# Altium PCB DigiPidCntlrPcbDoc.PcbDoc
Units mil, origin at the board's own origin, x right, y up, seen from the top; angles counter-clockwise.
Board outline 6000 x 4430 mil, 2 copper layers (Top Layer, Bottom Layer); 16 components, 8 nets, 34 pads, 0 vias.
Unrouted connection lines stored in the file: 22.
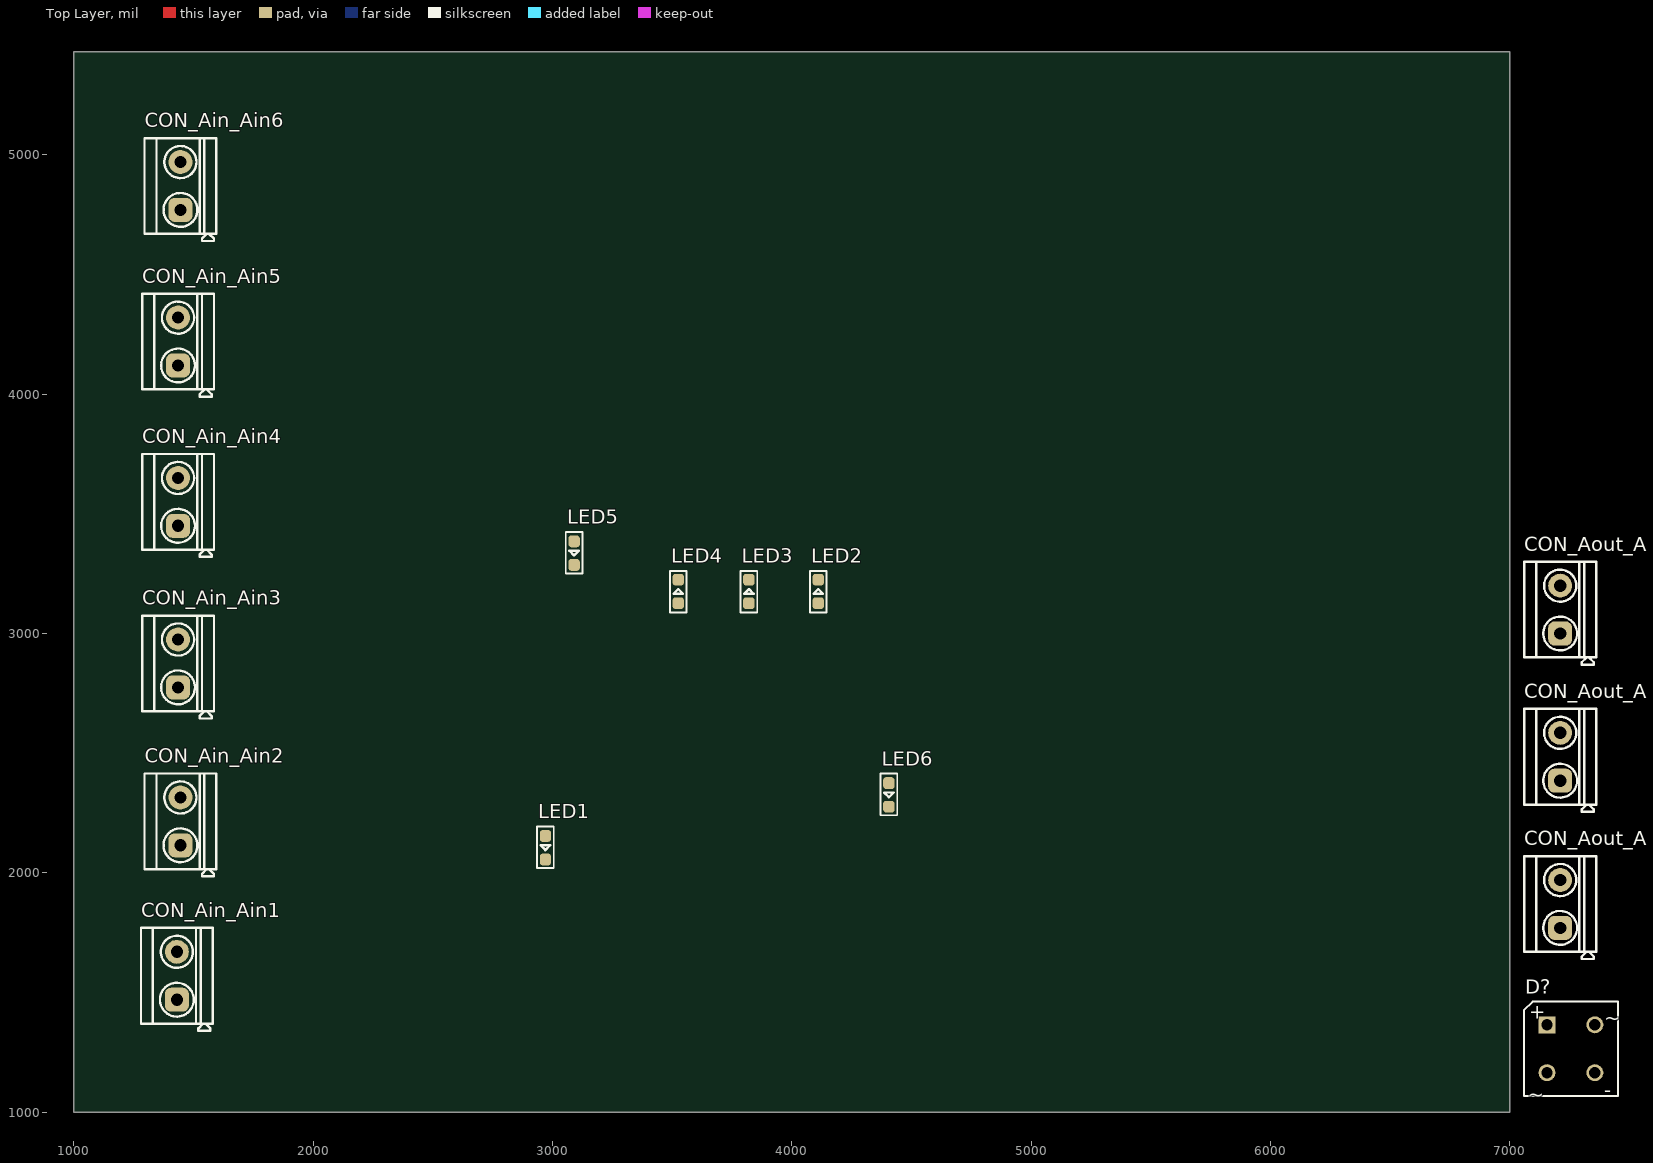
[diagram p0: Top Layer view]
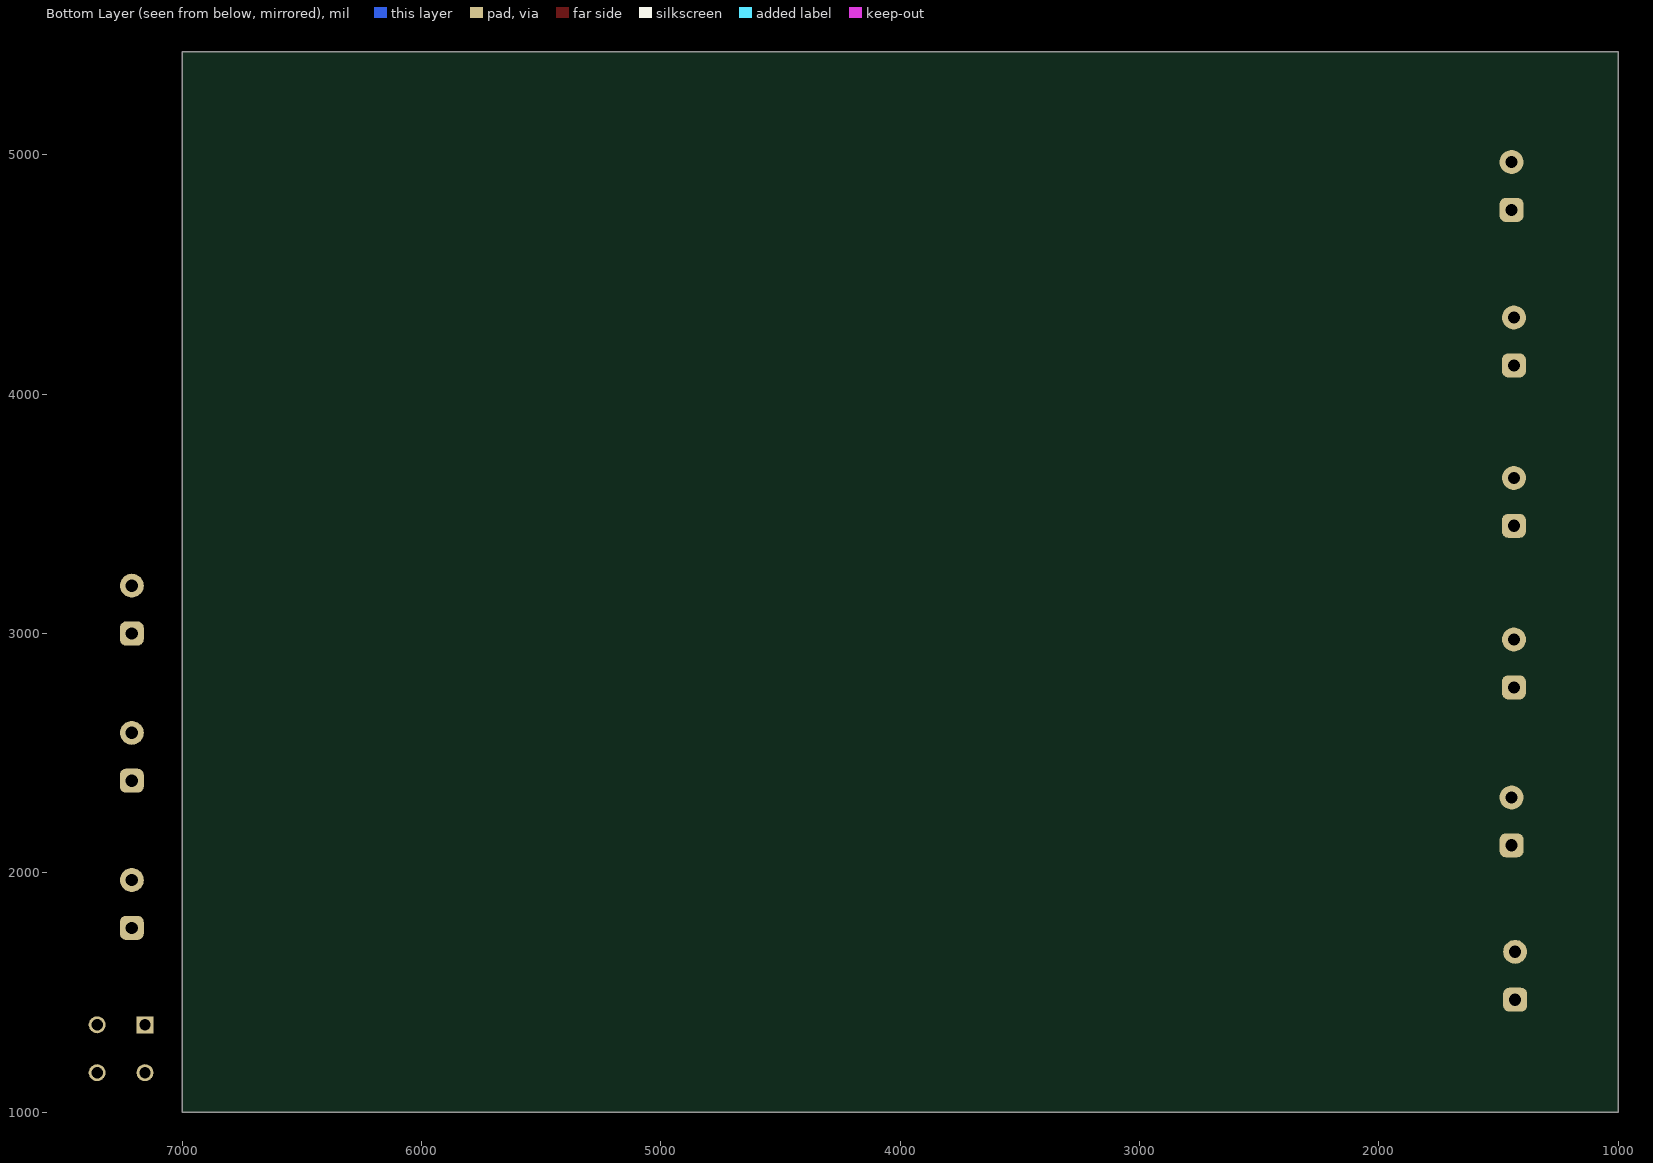
[diagram p1: Bottom Layer view, seen from below]

## Layer stack, top to bottom
Top Solder: solder mask 0.4, Solder Resist, Dk 3.5
Top Layer: signal copper 1.4
Dielectric 1: dielectric 12.6, FR-4, Dk 4.8
Bottom Layer: signal copper 1.4
Bottom Solder: solder mask 0.4, Solder Resist, Dk 3.5

## Board outline
1000,1000 7000,1000 7000,5430 1000,5430

## Design rules (kind name [scope] priority, off if disabled: settings)
Clearance [All] p1: gap=10 ignorepadtopadclearanceinfootprint=FALSE except(0: Arc-Hole Track-Hole SMDPad-Hole THPad-Hole Via-Hole Fill-Hole Poly-Hole Region-Hole Text-Hole)
PolygonConnect [All] p1: connectstyle=Relief reliefconductorwidth=10 reliefentries=4 polygonreliefangle="90 Angle" airgapwidth=10
RoomDefinition Designator [InComponentClass('Designator')] p1: confinementstyle=ConfineIn formatcopy=TRUE lockcomponents=FALSE outline 7045,1055 7465,1055 7465,1575 7045,1575
RoomDefinition Aout3 [InComponentClass('Aout3')] p2: confinementstyle=ConfineIn formatcopy=TRUE lockcomponents=FALSE outline 7045,2860 7880,2860 7880,3420 7045,3420
RoomDefinition Aout2 [InComponentClass('Aout2')] p3: confinementstyle=ConfineIn formatcopy=TRUE lockcomponents=FALSE outline 7045,2245 7880,2245 7880,2805 7045,2805
RoomDefinition Aout1 [InComponentClass('Aout1')] p4: confinementstyle=ConfineIn formatcopy=TRUE lockcomponents=FALSE outline 7045,1630 7860,1630 7860,2190 7045,2190
RoomDefinition Ain2 [InComponentClass('Ain2')] p5: confinementstyle=ConfineIn formatcopy=TRUE lockcomponents=FALSE outline 1280,1975 1995,1975 1995,2535 1280,2535
RoomDefinition Ain3 [InComponentClass('Ain3')] p6: confinementstyle=ConfineIn formatcopy=TRUE lockcomponents=FALSE outline 1270,2635 1985,2635 1985,3195 1270,3195
RoomDefinition Ain4 [InComponentClass('Ain4')] p7: confinementstyle=ConfineIn formatcopy=TRUE lockcomponents=FALSE outline 1270,3310 1985,3310 1985,3870 1270,3870
RoomDefinition Ain5 [InComponentClass('Ain5')] p8: confinementstyle=ConfineIn formatcopy=TRUE lockcomponents=FALSE outline 1270,3980 1985,3980 1985,4540 1270,4540
RoomDefinition Ain6 [InComponentClass('Ain6')] p9: confinementstyle=ConfineIn formatcopy=TRUE lockcomponents=FALSE outline 1280,4630 1995,4630 1995,5190 1280,5190
RoomDefinition Digi_PID_Cltr [InComponentClass('Digi_PID_Cltr')] p10: confinementstyle=ConfineIn formatcopy=TRUE lockcomponents=FALSE outline 2670,1840.79 5395,1840.79 5395,3795 2670,3795
RoomDefinition Ain1 [InComponentClass('Ain1')] p11: confinementstyle=ConfineIn formatcopy=TRUE lockcomponents=FALSE outline 1265,1330 1960,1330 1960,1890 1265,1890
RoutingVias [All] p1: holewidth=28 width=50 viastyle="Through Hole" minholewidth=28 minwidth=50 maxholewidth=28 maxwidth=50
SolderMaskExpansion [All] p1: expansion=4 istentingtop=FALSE
Width [All] p1: maxlimit=10 minlimit=10 preferedwidth=10
30 further rules are at their usual default settings.

## Classes and differential pairs
component class Designator: D?
component class Aout3: CON_Aout_Aout3
component class Aout2: CON_Aout_Aout2
component class Aout1: CON_Aout_Aout1
channel class A_out_DigiPidCntlr: Aout1 Aout2 Aout3
channel class A_in_DigiPidCntlr: Ain1 Ain2 Ain3 Ain4 Ain5 Ain6
component class Digi_PID_Cltr: LED1 LED2 LED3 LED4 LED5 LED6
component class Ain6: CON_Ain_Ain6
component class Ain5: CON_Ain_Ain5
component class Ain4: CON_Ain_Ain4
component class Ain3: CON_Ain_Ain3
component class Ain2: CON_Ain_Ain2
component class Ain1: CON_Ain_Ain1

## Components (designator, comment, footprint, x,y, rotation, side; value= is the part's Value field where it differs from the comment)
CON_Ain_Ain1 "screw term 2 pin, 5.08mm" "MKDSN 1,5/ 2-5,08" 1430,1570 r90 top (schematic designator CON_Ain)
CON_Ain_Ain2 "screw term 2 pin, 5.08mm" "MKDSN 1,5/ 2-5,08" 1445,2215 r90 top (schematic designator CON_Ain)
CON_Ain_Ain3 "screw term 2 pin, 5.08mm" "MKDSN 1,5/ 2-5,08" 1435,2875 r90 top (schematic designator CON_Ain)
CON_Ain_Ain4 "screw term 2 pin, 5.08mm" "MKDSN 1,5/ 2-5,08" 1435,3550 r90 top (schematic designator CON_Ain)
CON_Ain_Ain5 "screw term 2 pin, 5.08mm" "MKDSN 1,5/ 2-5,08" 1435,4220 r90 top (schematic designator CON_Ain)
CON_Ain_Ain6 "screw term 2 pin, 5.08mm" "MKDSN 1,5/ 2-5,08" 1445,4870 r90 top (schematic designator CON_Ain)
CON_Aout_Aout1 "screw term 2 pin, 5.08mm" "MKDSN 1,5/ 2-5,08" 7210,1870 r90 top (schematic designator CON_Aout)
CON_Aout_Aout2 "screw term 2 pin, 5.08mm" "MKDSN 1,5/ 2-5,08" 7210,2485 r90 top (schematic designator CON_Aout)
CON_Aout_Aout3 "screw term 2 pin, 5.08mm" "MKDSN 1,5/ 2-5,08" 7210,3100 r90 top (schematic designator CON_Aout)
D? "Bridge1" D-38 7255,1265 r0 top
LED1 "LED" "SMD LED 0805" 2970,2105 r270 top
LED2 "LED" "SMD LED 0805" 4110,3175.79 r90 top
LED3 "LED" "SMD LED 0805" 3820,3175.79 r90 top
LED4 "LED" "SMD LED 0805" 3525,3175.79 r90 top
LED5 "LED" "SMD LED 0805" 3090,3335.79 r270 top
LED6 "LED" "SMD LED 0805" 4405,2325.79 r270 top

## Footprints (in the part's own frame and the unit in brackets; to place one, negate y for a bottom-side part, rotate by r counter-clockwise, add the part's x,y. Pads: shape width x height; smd on the part's side, far side on the other; paste and mask are expansions set on the pad)
D-38 [mm] "Bridge Rectifier; 4 Terminals; Body 9.4 x 9.4 mm (typ); Pitch 5.08 mm"
  rect 1.8x1.8 hole 1.2: 1(-2.54,2.54)
  round 1.8 hole 1.2: 2(-2.54,-2.54) 3(2.54,-2.54) 4(2.54,2.54)
  silkscreen extent -5,-5 5,5, body extent -5,-5 5,5, height 9.91
"MKDSN 1,5/ 2-5,08" [mil]
  rrect50% 100x100 hole 51: 1(-100,0)
  round 100 hole 51: 2(100,0)
  silkscreen extent -230,-150 200,150, body extent -222,-163 202,160, height 404
"SMD LED 0805" [mm]
  rrect50% 1.25x1.2 smd: A(-1.25,0) K(1.25,0)
  silkscreen extent -2.25,-0.89 2.16,0.89, body extent -1.01,-0.62 1.01,0.63, height 1.1

## Part data
CON_Ain_Ain1 CON_Ain_Ain2 CON_Ain_Ain3 CON_Ain_Ain4 CON_Ain_Ain5 CON_Ain_Ain6 CON_Aout_Aout1 CON_Aout_Aout2 CON_Aout_Aout3: library part 2_pin_5.08mm, "2_pin_5.08mm"
D?: "Full Wave Diode Bridge", DatasheetVersion=E2732B, LatestRevisionDate=29-May-2009, LatestRevisionNote="Sch pins A & K swapped.", PackageDescription="Bridge Rectifier; 4 Terminals; Body 9.4 x 9.4 mm (typ); Pitch 5.08 mm", PackageReference=D-38, Published=8-Jun-2000, Publisher="Altium Limited"

## Nets (pads, with @x,y where several pads share a name; then routed paths per layer and width w, separated by ;. In a path a pad name is that pad's centre, name@x,y a point inside that pad or via, vN(x,y) a via of type N, cw(c..) or ccw(c..) an arc to the next point about the centre after c; other vN are vias at no path point)
Ain1: CON_Ain_Ain1.2 LED1.A
Ain2: CON_Ain_Ain2.2 LED2.A
Ain3: CON_Ain_Ain3.2 LED3.A
Ain4: CON_Ain_Ain4.2 LED4.A
Ain5: CON_Ain_Ain5.2 LED5.A
Ain6: CON_Ain_Ain6.2 LED6.A
GND: CON_Ain_Ain1.1 CON_Ain_Ain2.1 CON_Ain_Ain3.1 CON_Ain_Ain4.1 CON_Ain_Ain5.1 CON_Ain_Ain6.1 CON_Aout_Aout1.1 CON_Aout_Aout2.1 CON_Aout_Aout3.1 LED1.K LED2.K LED3.K LED4.K LED5.K LED6.K
NetCON_Aout_Aout1_2: CON_Aout_Aout1.2 CON_Aout_Aout2.2 CON_Aout_Aout3.2
pads on no net: D?.1 D?.2 D?.3 D?.4

## Text inside footprints (layer, text, board x,y; h text height)
D?: Top Overlay "+" at 7081.38,1389.57 h59.06; Top Overlay "-" at 7395,1065 h59.05; Top Overlay "~" at 7075,1045 h59.05; Top Overlay "~" at 7395,1365 h59.05